# Altium PCB ReceiverSlave.PcbDoc
Units mm, origin at the board's own origin, x right, y up, seen from the top; angles counter-clockwise.
Board outline 46.48 x 48.01 mm, 2 copper layers (Top Layer, Bottom Layer), stack 1.571 mm thick; 31 components, 22 nets, 86 pads, 0 vias.
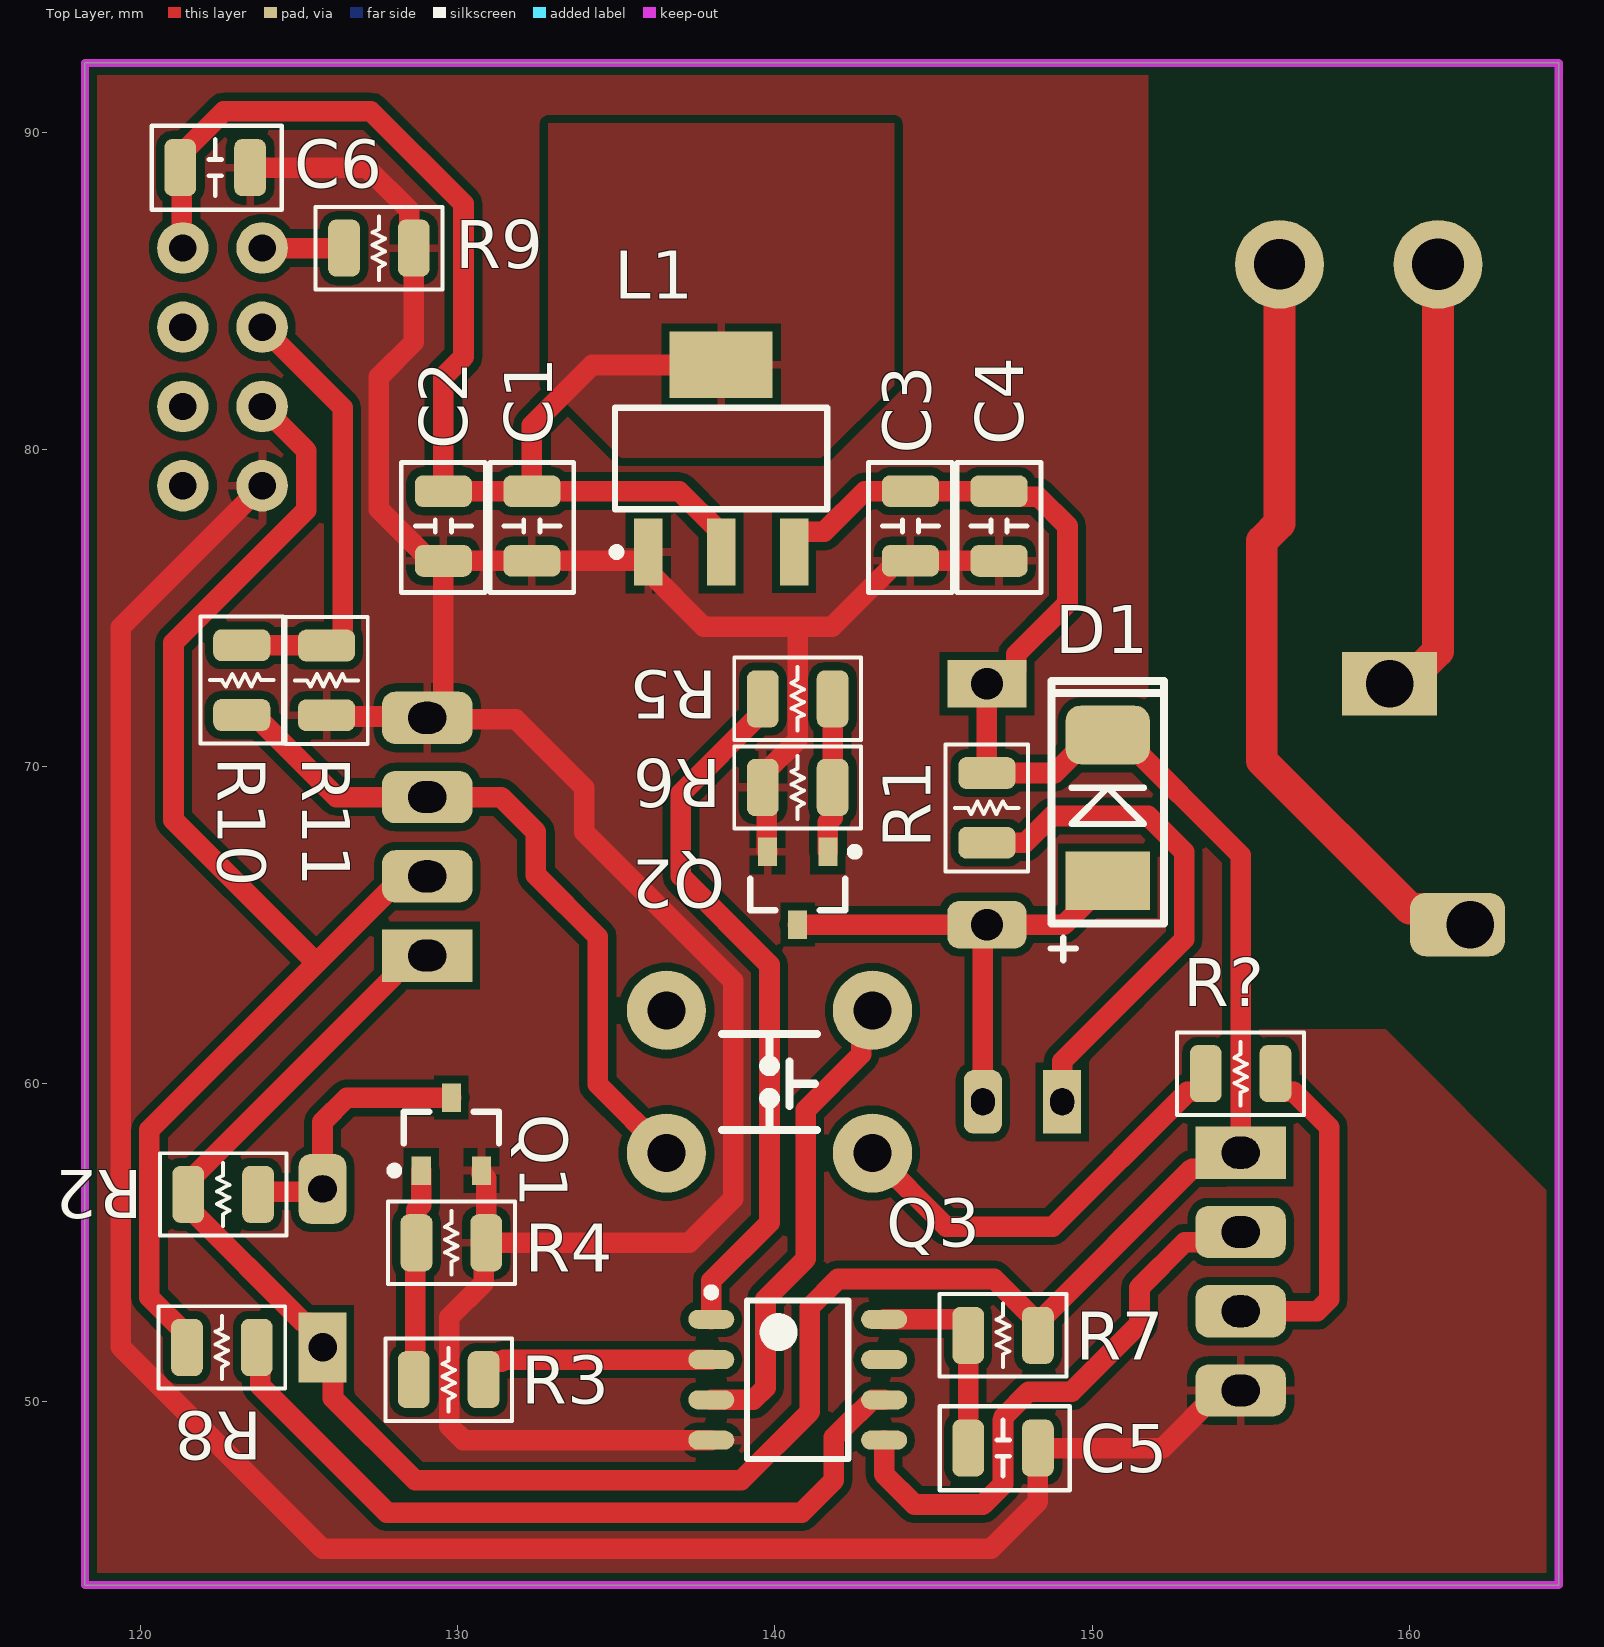
[diagram p0: Top Layer view]
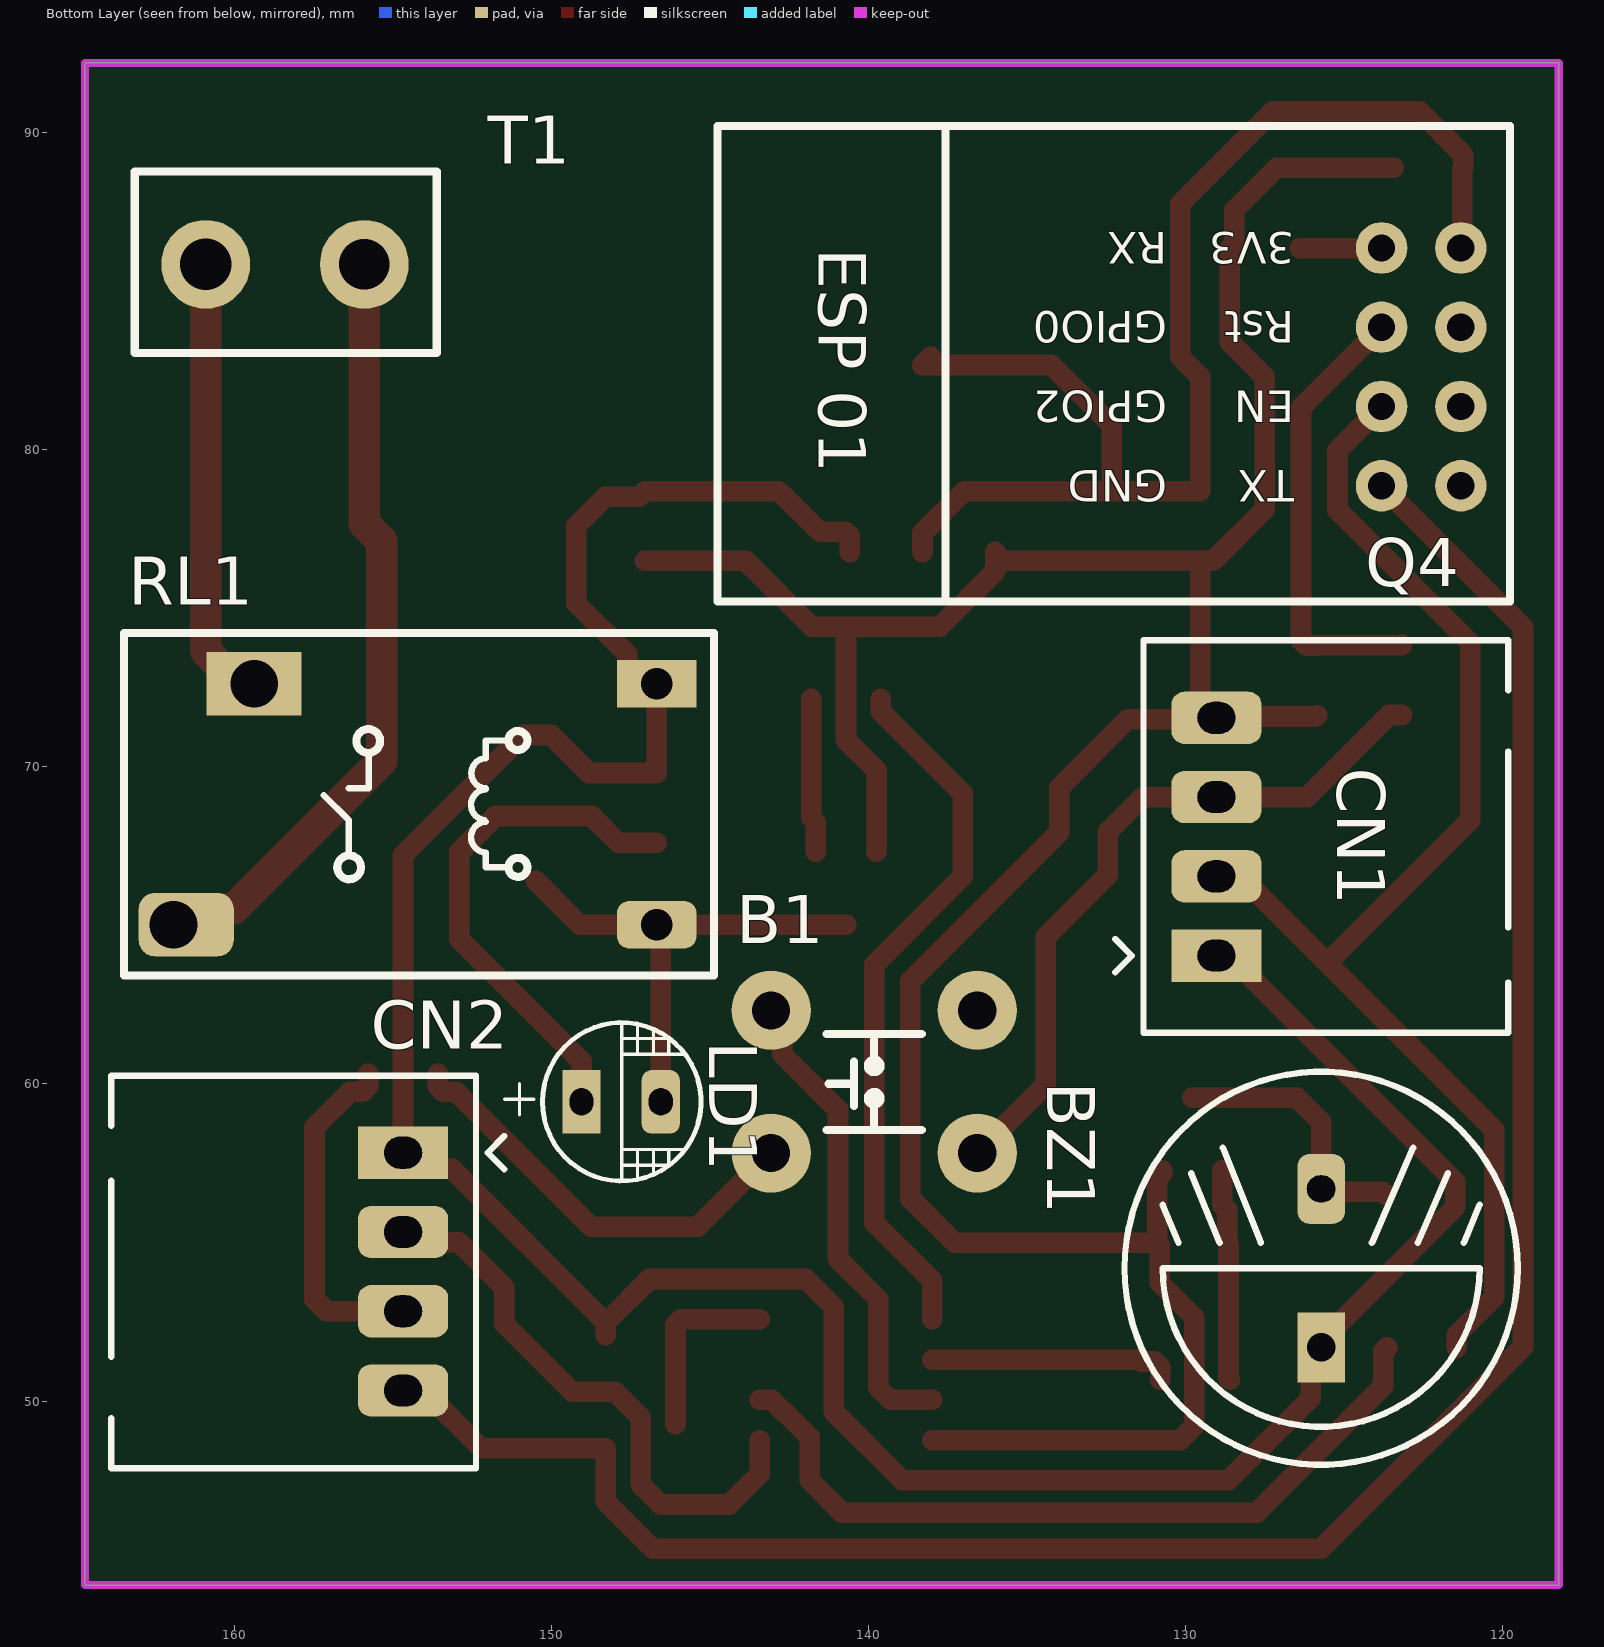
[diagram p1: Bottom Layer view, seen from below]
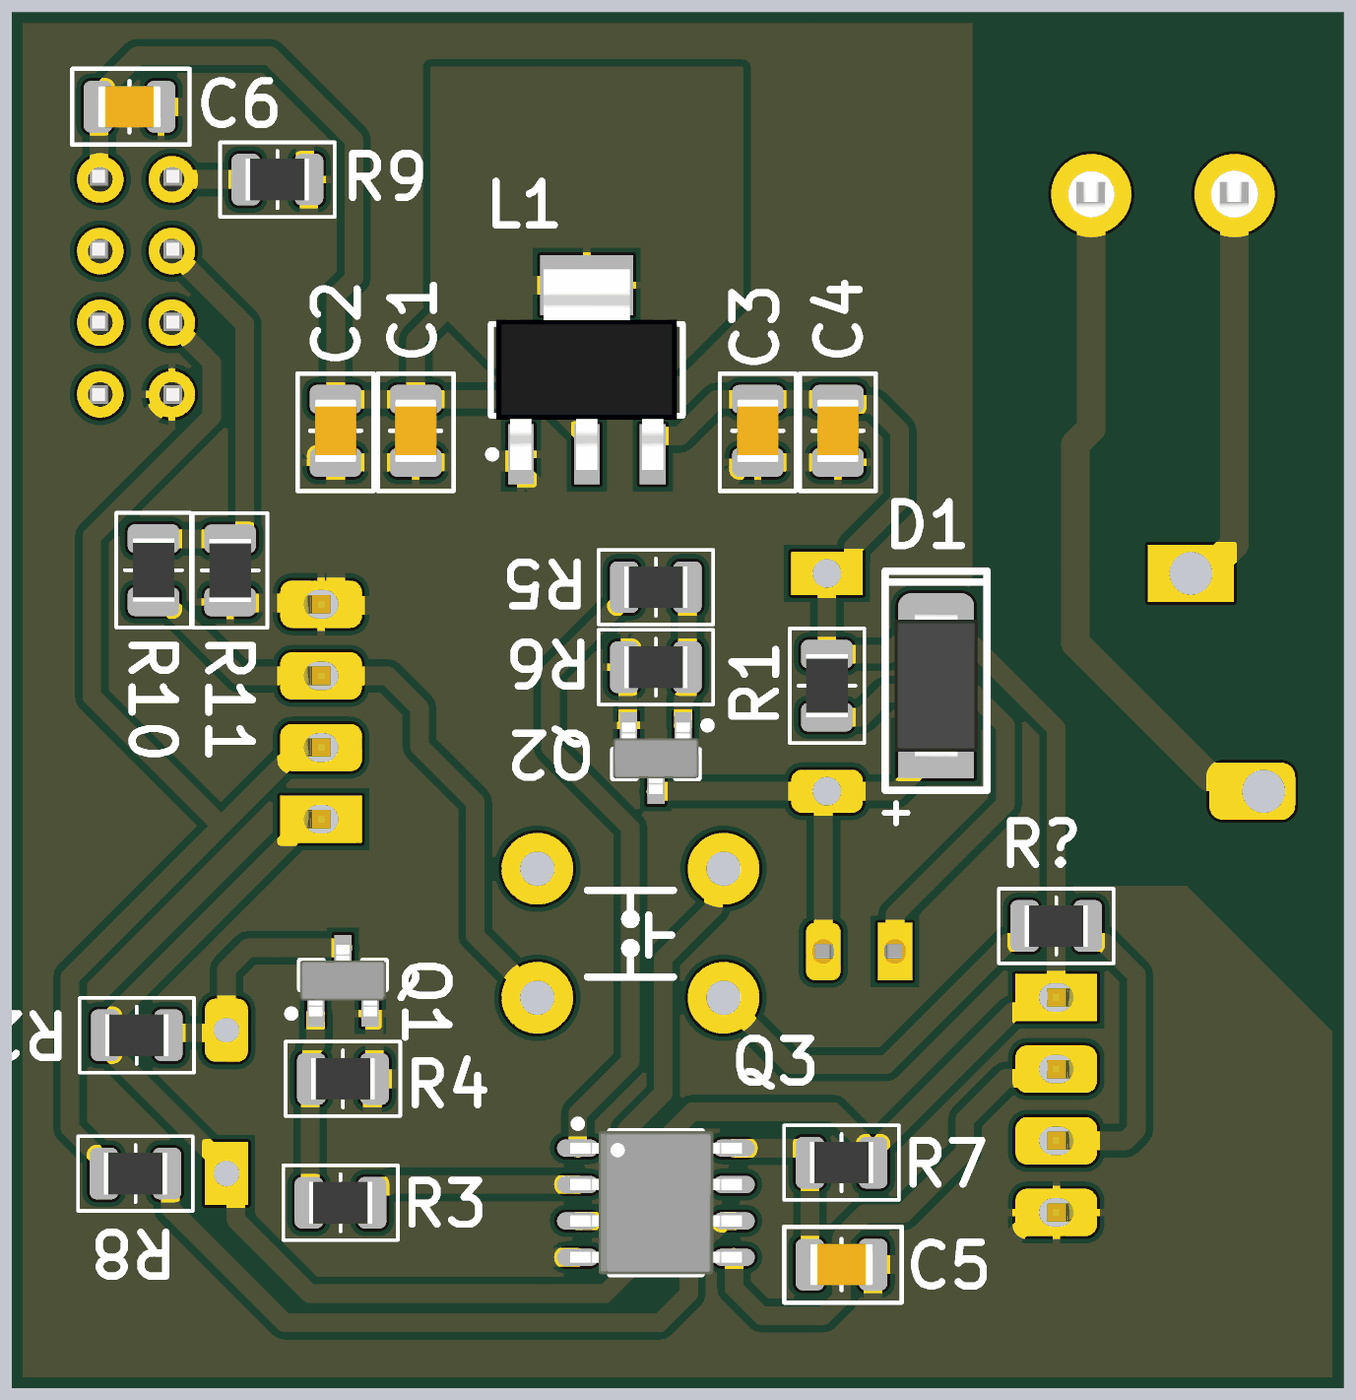
[diagram p2: 3D render of the assembled board from above, using the file's embedded part models]
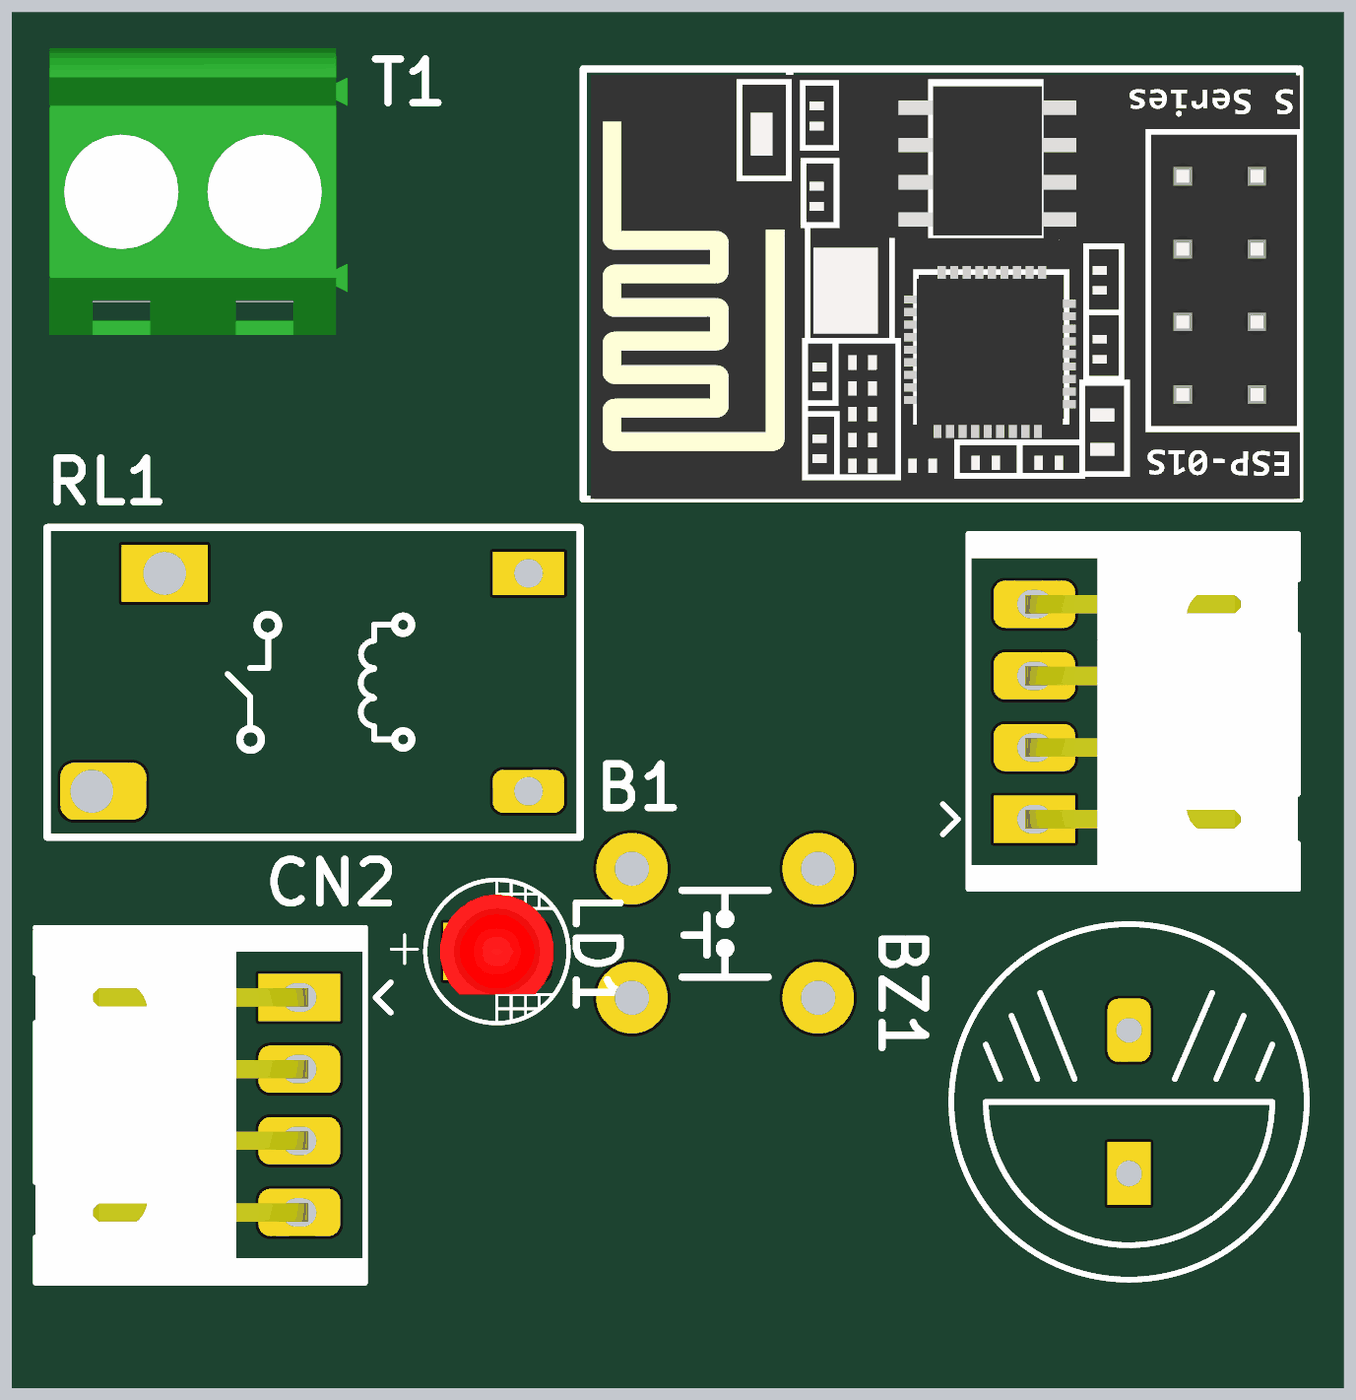
[diagram p3: 3D render of the assembled board from below, using the file's embedded part models]

## Layer stack, top to bottom
Top Solder: solder mask 0.0102, Solder Resist, Dk 3.5
Top Layer: signal copper 0.0356
Dielectric 1: dielectric 1.5, FR-4, Dk 4.8
Bottom Layer: signal copper 0.0356
Bottom Solder: solder mask 0.0102, Solder Resist, Dk 3.5

## Board outline
118.237,44.196 118.237,92.202 164.719,92.202 164.719,44.196

## Design rules (kind name [scope] priority, off if disabled: settings)
Clearance [All] p1: gap=0.254 ignorepadtopadclearanceinfootprint=FALSE except(0: Arc-Hole Track-Hole SMDPad-Hole THPad-Hole Via-Hole Fill-Hole Poly-Hole Region-Hole Text-Hole)
PolygonConnect [All] p1: connectstyle=Relief reliefconductorwidth=0.254 reliefentries=4 polygonreliefangle="90 Angle" airgapwidth=0.254
RoutingVias [All] p1: holewidth=0.711 width=1.27 viastyle="Through Hole" minholewidth=0.711 minwidth=1.27 maxholewidth=0.711 maxwidth=1.27
SolderMaskExpansion [All] p1: expansion=0.102 istentingtop=FALSE
Width [All] p1: maxlimit=1 minlimit=0.6 preferedwidth=0.65 minimp=50.000000 maximp=50.000000 favimp=50.000000
30 further rules are at their usual default settings.

## Components (designator, comment, footprint, x,y, rotation, side; value= is the part's Value field where it differs from the comment)
B1 "Push Button" "Push button 4 pin" 139.827,60.071 r180 bottom
BZ1 "Buzzer" LS_12.2x6.5_P5_PS1240P02BT 125.73,54.189 r90 bottom
C1 "100nF" C_0805 132.334,77.597 r270 top
C2 "22uF" C_0805 129.54,77.597 r270 top
C3 "10uF" C_0805 144.272,77.597 r270 top
C4 "100nF" C_0805 147.066,77.597 r270 top
C5 "22uF" C_0805 147.193,48.514 r0 top
C6 "100nF" C_0805 122.344,88.9 r0 top
CN1 "4P 2.5mm" "CN_B4B-XH-A_BLUE _RightAngle" 129.032,66.548 r0 bottom
CN2 "4P 2.5mm" "CN_B4B-XH-A_BLUE _RightAngle" 154.686,55.332 r180 bottom
D1 "V A" D_DO214AC-ES1J 150.495,68.707 r90 top
L1 "AMS1117" AMS1117 138.303,79.727 r90 top
LD1 "20mA" LED_3x5_P2.5 147.808,59.436 r180 bottom
Q1 "BC817" BC817 129.794,58.42 r90 top
Q2 "BC817" BC817 140.716,66.175 r270 top
Q3 "SM16703P" SM16703P 140.716,50.673 r0 top
Q4 "ESP8266 01s" Esp01 121.325,78.867 r0 bottom
R1 "600Ω" R_0805 146.685,68.707 r270 top
R2 "1KΩ" R_0805 122.598,56.515 r180 top
R3 "10KΩ" R_0805 129.71,50.673 r180 top
R4 "47KΩ" R_0805 129.794,54.991 r0 top
R5 "10KΩ" R_0805 140.716,72.144 r0 top
R6 "47KΩ" R_0805 140.716,69.35 r180 top
R7 "1.5KΩ" R_0805 147.193,52.07 r0 top
R8 "200KΩ" R_0805 122.555,51.689 r180 top
R9 "4.3KΩ" R_0805 127.508,86.36 r180 top
R10 "10KΩ" R_0805 123.183,72.736 r90 top
R11 "4.3KΩ" R_0805 125.857,72.728 r90 top
R? "0Ω" R_0805 154.686,60.325 r0 top
RL1 "VDC A" RL_SPST_5ARelay_AZ7709-1AB-12DE 154.305,68.824 r0 bottom
T1 "Terminal Con 2P" "Terminal 2P" 155.909,85.852 r0 bottom

## Footprints (in the part's own frame and the unit in brackets; to place one, negate y for a bottom-side part, rotate by r counter-clockwise, add the part's x,y. Pads: shape width x height; smd on the part's side, far side on the other; paste and mask are expansions set on the pad)
AMS1117 [mm] "SOT223, 4-Leads, Body 6.30x7.00mm (avg), Pitch 2.30mm, IPC Medium Density"
  rect 2.1x0.9 smd: 1(-2.95,2.3) 2(-2.95,0) 3(-2.95,-2.3)
  rect 2.1x3.25 smd: 4(2.95,0)
  silkscreen extent -3.07,-3.35 1.6,3.42, body extent -3.5,-3.35 3.5,3.35, height 1.7
BC817 [mm] "npn"
  rect 0.9x0.6 smd: 1(-1.15,0.95) 2(-1.15,-0.95) 3(1.15,0)
  silkscreen extent -1.27,-1.5 0.7,1.92, body extent -1.25,-1.5 1.25,1.5, height 1.1
C_0805 [mm]
  rrect50% 1x1.8 smd: 1(-1.1,0) 2(1.1,0)
  silkscreen extent -2,-1.33 2.1,1.32, body extent -1.1,-0.73 1.1,0.73, height 1
"CN_B4B-XH-A_BLUE _RightAngle" [mm] "2.5mm Pitch, 4pins,RightAngle, XH Connector"
  rect 2.85x1.65 hole 1.2 slot 1 at 90 deg: 1(0,2.5)
  rrect50% 2.85x1.65 hole 1.2 slot 1 at 90 deg: 2(0,0) 3(0,-2.5) 4(0,-5)
  silkscreen extent -9.2,-7.45 3.19,4.93, body extent -9.2,-7.45 2.3,4.95, height 6.2
D_DO214AC-ES1J [mm] "Molded Diode, 2-Leads, Body 4.29x2.69mm, IPC Medium Density"
  rect 1.85x2.65 smd: 1(-2.3,0)
  rrect50% 1.85x2.65 smd: 2(2.3,0)
  silkscreen extent -4.8,-1.78 4,1.8, body extent -2.52,-1.45 2.52,1.45, height 2.44
Esp01 [mm] "esp8266 01"
  round 1.624 hole 0.862: 1(2.5,0) 2(0,0) 3(2.5,-2.5) 4(0,-2.5) 5(2.5,-5) 6(0,-5) 7(2.5,-7.5) 8(0,-7.5)
  silkscreen extent -1.55,-11.35 23.45,3.65, body extent -1.55,-11.15 23.2,3.65, height 9.65
LED_3x5_P2.5 [mm]
  rect 1.2x2 hole 0.85 slot 0.75 at 0 deg: 1(-1.25,0)
  rrect50% 1.2x2 hole 0.85 slot 0.75 at 0 deg: 2(1.25,0)
  silkscreen extent -3.67,-2.5 2.52,2.5, body extent -1.97,-1.5 2.01,1.99, height 7.38
LS_12.2x6.5_P5_PS1240P02BT [mm] "PS1240P02BT, ø12.2x6.5 P5 70dB 4kHz 3~30V"
  rect 2.2x1.5 hole 0.9: 1(-2.5,0)
  rrect50% 2.2x1.5 hole 0.9 slot 0.85 at 0 deg: 2(2.5,0)
  silkscreen extent -6.2,-6.2 6.2,6.2, body extent -6.09,-6.1 6.09,6.1, height 6.55
"Push button 4 pin" [mm] "Standard 4 pin push button black"
  round 2.5 hole 1.2: 1(-3.25,2.25) 2(3.25,2.25) 3(-3.25,-2.25) 4(3.25,-2.25)
  silkscreen extent -1.5,-1.52 1.5,1.5, body extent -3.95,-3.1 3.95,3.1, height 8.65
R_0805 [mm]
  rrect50% 1x1.8 smd: 1(-1.1,0) 2(1.1,0)
  silkscreen extent -2,-1.3 2,1.3, body extent -1.1,-0.72 1.1,0.73, height 0.65
RL_SPST_5ARelay_AZ7709-1AB-12DE [mm]
  rect 2.5x1.5 hole 1: 1(-7.62,-3.8)
  rrect50% 2.5x1.5 hole 1: 2(-7.62,3.8)
  rect 3x2 hole 1.5: 3(5.08,-3.8)
  rrect50% 3x2 hole 1.5 copper offset -0.4,0: 4(7.62,3.8)
  silkscreen extent -9.42,-5.4 9.18,5.4, body extent -9.42,-5.4 9.18,5.4, height 15.5
SM16703P [mm] "SOP, 8-Leads, Body 4.90x3.90mm, Pitch 1.27mm, IPC Medium Density"
  oval 1.45x0.6 smd: 1(-2.725,1.905) 2(-2.725,0.635) 3(-2.725,-0.635) 4(-2.725,-1.905) 5(2.725,-1.905) 6(2.725,-0.635) 7(2.725,0.635) 8(2.725,1.905)
  silkscreen extent -2.85,-2.5 1.6,2.88, body extent -3,-2.5 3,2.5, height 1.75
"Terminal 2P" [mm]
  round 2.8 hole 1.6: 1(0,0)
  round 2.8 hole 1.63: 2(5,0)
  silkscreen extent -2.29,-2.92 7.24,2.79, body extent -2.91,-5.08 7.49,4.92, height 14.45

## Part data
B1: library part "Push Button 4 pin", "4 pin statndard push button"
C1 C2 C3 C4 C5 C6: library part "Capacitor>> Non-Polar"
CN1 CN2: library part "Connector>> 4Pins"
D1: library part "Diode>> General Purpose"
LD1: library part "LED>> General Purpose"
Q1 Q2: library part "Transistor>> BJT npn"
Q3: "Copy of WS2811"
Q4: library part ESP01
R1 R2 R3 R4 R5 R6 R7 R8 R9 R10 R11 R?: library part "Resistor>> General Purpose"
RL1: library part "Relay>> SPST"

## Nets (pads, with @x,y where several pads share a name; then routed paths per layer and width w, separated by ;. In a path a pad name is that pad's centre, name@x,y a point inside that pad or via, vN(x,y) a via of type N, cw(c..) or ccw(c..) an arc to the next point about the centre after c; other vN are vias at no path point)
3V3: C1.1 C2.1 C6.1 L1.2 L1.4 Q4.8 | length 42.1
  Top Layer w0.65: Q4.8 121.284,86.407 121.284,88.86 C6.1 121.244,89.3 122.622,90.678 127.254,90.678 130.175,87.757 130.175,82.931 129.54,82.296 C2.1 C1.1 ; L1.4@138.049,82.931 L1.4 134.239,82.677 132.334,80.772 C1.1 ; L1.2 138.303,77.377 136.983,78.697 C1.1
+12: BZ1.1 C3.1 C4.1 CN1.1 CN2.1 D1.2 L1.3 R1.1 R2.2 R7.2 RL1.1 | length 95.5
  Top Layer w0.65: CN1.1 128.432,64.048 127.932,63.548 127.932,63.349 121.498,56.915 R2.2 121.498,56.115 125.149,52.464 125.305,52.464 125.73,52.039 BZ1.1 126.059,51.36 126.059,50.09 128.651,47.498 138.938,47.498 141.097,49.657 141.097,52.959 141.986,53.848 146.915,53.848 R7.2@148.293,52.47 ; L1.3 140.603,77.287 140.728,77.412 141.547,77.412 142.832,78.697 C3.1 ; C3.1@144.4,78.697 C4.1 147.241,78.522 148.3,78.522 149.225,77.597 149.225,75.164 147.61,73.549 147.61,73.049 147.185,72.624 RL1.1 R1.1 148.821,69.807 150.021,71.007 D1.2 150.895,71.007 154.686,67.216 CN2.1 154.186,57.332 153.155,57.332 R7.2@148.293,52.47 ; R7.2 R7.2@148.293,52.47
DIN: CN1.2 Q4.3 R8.2 | length 41.2
  Top Layer w0.65: R8.2 121.455,52.089 120.269,53.275 120.269,58.547 125.539,63.817 ; Q4.3 125.216,79.976 125.216,78.099 121.031,73.914 121.031,68.326 125.539,63.817 ; CN1.2 128.586,66.102 127.824,66.102 125.539,63.817
DOUT: CN2.2 Q3.5 | length 18.2
  Top Layer w0.65: Q3.5 143.441,47.694 144.399,46.736 146.558,46.736 147.193,47.371 147.193,49.403 147.214,49.424 147.214,49.507 147.999,50.292 149.352,50.292 151.496,52.436 151.496,53.579 152.924,55.007 154.361,55.007 CN2.2
FB: B1.4 CN1.3 R10.1 | length 22.6
  Top Layer w0.65: R10.1 123.583,71.636 126.172,69.048 CN1.3 131.358,69.048 132.461,67.945 132.461,66.592 134.41,64.643 134.41,59.988 B1.4
FB_OUT: B1.1 Q3.3 | length 15.2
  Top Layer w0.65: Q3.3 139.319,50.038 139.7,50.419 139.7,53.213 140.97,54.483 140.97,59.182 142.723,60.935 142.723,61.967 B1.1
GND: C1.2 C2.2 C3.2 C4.2 C5.2 C6.2 CN1.4 CN2.4 L1.1 Q1.2 Q2.2 Q3.4 Q4.1 R4.2 R6.2 R9.1 R11.1 | length 169.7
  Top Layer w0.65: C6.2 127.127,88.9 128.471,87.556 128.471,86.497 R9.1 128.608,83.396 127.508,82.296 127.508,78.129 129.14,76.497 C2.2 ; Q4.1 119.365,74.407 119.365,51.707 125.733,45.339 146.812,45.339 148.293,46.82 C5.2@148.293,48.371 ; R11.1 125.897,71.588 128.992,71.588 CN1.4 ; Q1.2@130.744,57.17 Q1.2 ; Q1.2@130.894,57.02 R4.2 ; L1.1 L1.1@136.003,76.622 ; Q3.4 130.175,48.768 129.731,49.212 129.731,52.642 130.821,53.732 130.821,54.918 R4.2 ; Q2.2 139.741,67.35 139.741,69.875 140.716,70.85 140.716,74.422 ; C4.2 C3.2 143.872,76.497 141.797,74.422 140.716,74.422 ; C5.2 152.221,48.514 154.039,50.332 CN2.4 ; CN1.4 129.047,71.548 129.54,72.041 C2.2 ; CN1.4 129.079,71.501 131.826,71.501 133.985,69.342 133.985,67.945 138.684,63.246 138.684,56.388 137.287,54.991 R4.2 ; C2.2 C1.2 135.878,76.497 L1.1@136.003,76.622 ; L1.1@136.003,76.622 136.003,76.177 137.758,74.422 140.716,74.422
NetB1_3: B1.3 R?.1 | length 13.8
  Top Layer w0.65: B1.3@143.002,57.746 B1.3 145.399,55.499 148.76,55.499 153.011,59.75 153.411,59.75 153.586,59.925 R?.1
NetBZ1_2: BZ1.2 Q1.3 R2.1 | length 8.6
  Top Layer w0.65: R2.1 123.785,56.602 125.643,56.602 BZ1.2 125.73,58.801 126.492,59.563 129.787,59.563 Q1.3
NetC5_1: C5.1 Q3.8 R7.1 | length 5.9
  Top Layer w0.65: Q3.8 145.918,52.578 146.093,52.403 R7.1 C5.1@146.093,49.276
NetCN2_3: CN2.3 R?.2 | length 11
  Top Layer w0.65: CN2.3 157.099,52.832 157.48,53.213 157.48,58.631 156.361,59.75 155.961,59.75 155.786,59.925 R?.2
NetD1_1: D1.1 LD1.2 Q2.3 RL1.2 | length 15.9
  Top Layer w0.65: Q2.3 143.688,65.025 143.689,65.024 RL1.2@146.558,65.024 ; LD1.2 RL1.2@146.558,65.024 ; D1.1 149.112,65.024 RL1.2 RL1.2@146.558,65.024
NetLD1_1: LD1.1 R1.2 | length 16.5
  Top Layer w0.65: R1.2 147.896,67.607 148.742,68.453 151.771,68.453 152.908,67.316 152.908,64.567 149.058,60.717 LD1.1
NetQ1_1: Q1.1 R3.2 R4.1 | length 6.7
  Top Layer w0.65: R3.2 128.652,50.715 128.652,54.949 R4.1 128.694,56.032 128.844,56.182 Q1.1
NetQ2_1: Q2.1 R5.2 R6.1 | length 4.9
  Top Layer w0.65: Q2.1 141.666,68.25 141.816,68.4 R6.1 R5.2
NetQ3_6: Q3.6 R8.1 | length 24.9
  Top Layer w0.65: R8.1 123.771,51.573 123.771,50.473 127.762,46.482 140.843,46.482 141.859,47.498 141.859,48.854 142.652,49.647 142.675,49.647 143.066,50.038 Q3.6
NetQ4_5: Q4.5 R10.2 R11.2 | length 14.1
  Top Layer w0.65: R10.2 123.188,73.832 R11.2@125.753,73.832 ; Q4.5 126.365,81.327 126.365,74.003 126.19,73.828 R11.2
NetQ4_7: Q4.7 R9.2 | length 2.6
  Top Layer w0.65: Q4.7 123.829,86.364 126.404,86.364 R9.2
NetRL1_3: RL1.3 T1.2 | length 14.7
  Top Layer w1: RL1.3@159.004,73.005 RL1.3 159.885,72.624 160.909,73.648 T1.2
NetRL1_4: RL1.4 T1.1 | length 24.6
  Top Layer w1: T1.1 155.909,77.677 155.354,77.122 155.354,70.198 160.028,65.524 161.425,65.524 RL1.4
OUT1: Q3.1 R5.1 | length 22.6
  Top Layer w0.65: Q3.1 137.991,53.79 139.827,55.626 139.827,63.754 137.033,66.548 137.033,69.161 139.616,71.744 R5.1
OUT2: Q3.2 R3.1 | length 7.7
  Top Layer w0.65: R3.1 130.81,51.073 130.985,51.248 131.385,51.248 131.445,51.308 Q3.2
pads on no net: B1.2 Q3.7 Q4.2 Q4.4 Q4.6

## Polygon pours and split planes (outlines as drawn)
GND on Top Layer "GND" (solid, pour order 1): 151.765,92.202 151.765,72.136 152.4,71.501 152.4,69.977 154.94,67.437 154.94,61.722 159.258,61.722 164.719,56.261 164.719,44.323 118.364,44.323 118.364,91.948 118.11,92.202
3V3 on Top Layer "3V3" (solid, pour order 0): 132.842,90.297 132.842,82.042 135.128,79.756 141.478,79.756 143.764,82.042 143.764,90.297

## Keep-outs
Keep-Out Layer:
  the board outline again, w0.254

## Text inside footprints (layer, text, board x,y; h text height)
Q4: Bottom Overlay "ESP 01" at 141.571,86.363 h1.5 r90; Bottom Overlay "RX" at 130.579,86.863 h1 r180; Bottom Overlay "EN" at 126.583,81.863 h1 r180; Bottom Overlay "GPIO0" at 130.579,84.363 h1 r180; Bottom Overlay "GPIO2" at 130.579,81.863 h1 r180; Bottom Overlay "GND" at 130.579,79.363 h1 r180; Bottom Overlay "TX" at 126.583,79.363 h1 r180; Bottom Overlay "3V3" at 126.583,86.863 h1 r180; Bottom Overlay "Rst" at 126.583,84.363 h1 r180